# EAGLE board latdr31 (EAGLE 7.7.0)
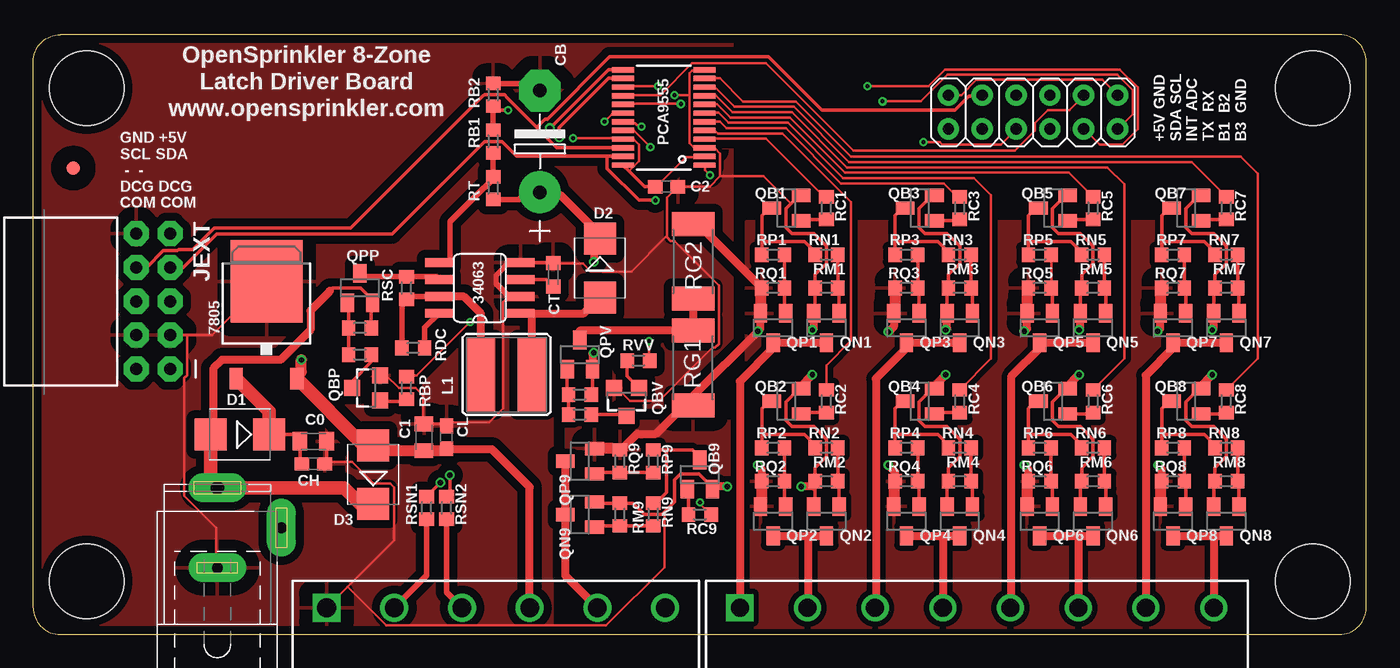
[diagram p0: board, top side]
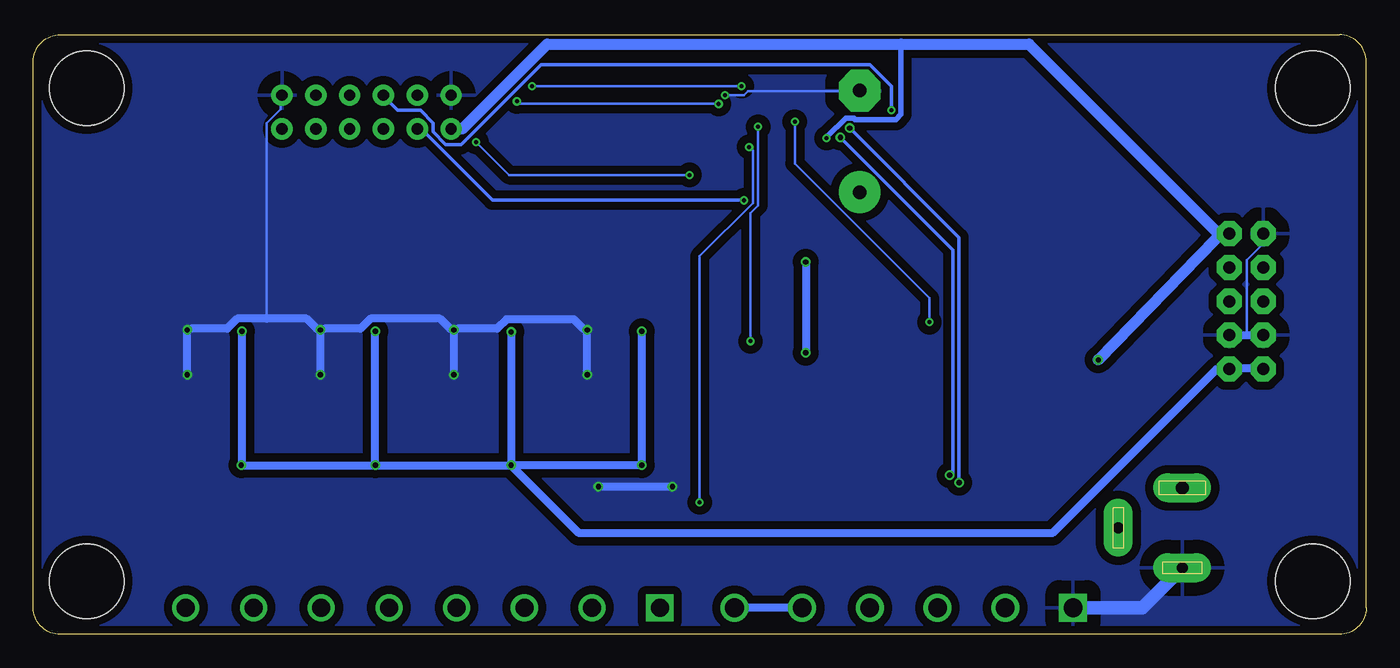
[diagram p1: board, bottom side, seen from below]

Size 100 x 45 mm. Coordinates in mm from the lower left corner, seen from the top.
Outline: 2,0 98,0 arc90 100,2 100,43 arc90 98,45 2,45 arc90 0,43 0,2 arc90 2,0
Copper layers (1*16): Top 0.035mm / dielectric 1.5mm / Bottom 0.035mm
Design rules "Fusion_eagle_rule_v1.1 *": minimum track width 6mil, minimum drill 12mil, track to track 6mil, track to pad 6mil, pad to pad 6mil, via to via 6mil, smd to smd 0mil, copper to edge 10mil, drill to drill 10mil, minimum pad ring 10mil, minimum via ring 6mil, stop-mask expansion 2mil, vias tented up to drill 100mil, thermal gap 40mil
Net classes: 0 default: width 0.203 mm, clearance 0.178 mm; 1 power: width 0.203 mm, clearance 0.178 mm; 2 relaypower: width 0.508 mm, clearance 0.305 mm; 3 signal: width 0.254 mm, clearance 0.178 mm; 4 adc: width 0.406 mm, clearance 0.178 mm
Holes 5.6 mm at 4,4 96,4 4,41 96,41

## Footprints (pad centres in the part's own frame; a part is rotated, then mirrored left to right if it is on the bottom)
FIDUCIAL_1MM = smd 1 x 1: 1 0,0
TO252 = smd 1 x 1.6: 1 -2.28,-4.8; 2 2.28,-4.8 | smd 5.4 x 6.2: 3 0,2.5
SO08 = smd 0.66 x 2.032: 1 -1.905,-3.073; 2 -0.635,-3.073; 3 0.635,-3.073; 4 1.905,-3.073; 5 1.905,3.073; 6 0.635,3.073; 7 -0.635,3.073; 8 -1.905,3.073
C0805K = smd 1.1 x 1.4: 1 -1,0; 2 1,0
C0603 = smd 1.1 x 1: 1 -0.85,0; 2 0.85,0
E7,5-16 = drill 1.016 pad 3.15: + -3.81,0 | drill 1.016 pad 3.15 octagon: - 3.81,0
C0603K = smd 1.05 x 1.08: 1 -0.875,0; 2 0.875,0
SMB = smd 2.4 x 2.4: A 2.2,0; C -2.2,0
SPC4077 = drill 0.8 pad 2.184 long: 1 -3,0; 2 0,-4.8 | drill 1 pad 2.184 long: 3 3,0
SCREWTERMINAL-5MM-6 = drill 1.4 pad 2.032 square: 1 0,0 | drill 1.4 pad 2.032: 2 5.08,0; 3 10.16,0; 4 15.24,0; 5 20.32,0; 6 25.4,0
2X06 = drill 0.85 pad 1.6: 1 -6.35,-1.27; 2 -6.35,1.27; 3 -3.81,-1.27; 4 -3.81,1.27; 5 -1.27,-1.27; 6 -1.27,1.27; 7 1.27,-1.27; 8 1.27,1.27; 9 3.81,-1.27; 10 3.81,1.27; 11 6.35,-1.27; 12 6.35,1.27
2X5-RAF = drill 0.9 pad 1.88 octagon: 1 -1.27,5.08; 2 1.27,5.08; 3 -1.27,2.54; 4 1.27,2.54; 5 -1.27,0; 6 1.27,0; 7 -1.27,-2.54; 8 1.27,-2.54; 9 -1.27,-5.08; 10 1.27,-5.08
CR54 = smd 5.5 x 2.15: P$1 0,1.92; P$2 0,-1.92
TSSOP24 = smd 0.4 x 1.65: 1 -3.575,-3.05; 2 -2.925,-3.05; 3 -2.275,-3.05; 4 -1.625,-3.05; 5 -0.975,-3.05; 6 -0.325,-3.05; 7 0.325,-3.05; 8 0.975,-3.05; 9 1.625,-3.05; 10 2.275,-3.05; 11 2.925,-3.05; 12 3.575,-3.05; 13 3.575,3.05; 14 2.925,3.05; 15 2.275,3.05; 16 1.625,3.05; 17 0.975,3.05; 18 0.325,3.05; 19 -0.325,3.05; 20 -0.975,3.05; 21 -1.625,3.05; 22 -2.275,3.05; 23 -2.925,3.05; 24 -3.575,3.05
SOT23 = smd 1 x 1.4: 1 -0.95,-1.1; 2 0.95,-1.1; 3 0,1.1
SOT23-3 = smd 1.2 x 1.2: 1 -0.95,-1; 2 0.95,-1; 3 0,1.1
R0603 = smd 1 x 1.1: 1 -0.85,0; 2 0.85,0
R2512 = smd 1.8 x 3.2: 1 -2.8,0; 2 2.8,0
SCREWTERMINAL-5MM-8 = drill 1.35 pad 2.032 square: 1 0,0 | drill 1.35 pad 2.032: 2 5.08,0; 3 10.16,0; 4 15.24,0; 5 20.32,0; 6 25.4,0; 7 30.48,0; 8 35.56,0

## Placement (x,y rotation side)
0F  FIDUCIAL  [FIDUCIAL_1MM]  38,33.19 0 top
1F  FIDUCIAL  [FIDUCIAL_1MM]  3,35 0 top
7805  [TO252]  17.5,24 0 top
34063  [SO08]  33.5,26 90 top
C0  10uF  [C0805K]  21,14.5 0 top
C1  10uF  [C0805K]  29.3,14.8 90 top
C2  0.1u  [C0603]  47.5,33.6 0 top
CB  2200uF  [E7,5-16]  38,37 90 top
CH  0.1u  [C0603]  21,12.8 0 top
CL  0.1u  [C0603]  31,14.8 90 top
CT  470  [C0603K]  39,27 90 top
D1  SS34  [SMB]  15.5,15 180 top
D2  SS34  [SMB]  42.5,27.5 270 top
D3  SS34  [SMB]  25.5,12 90 top
J1  [SPC4077]  13.8,8 90 top
JCOM  [SCREWTERMINAL-5MM-6]  22,2 0 top
JCON  [2X06]  75,39.2 0 top
JEXT  M05X2RAF  [2X5-RAF]  9,25 180 top
L1  220uH  [CR54]  35.5,19.5 90 top
PCA9555  PCF8575TSSOP24  [TSSOP24]  47.3,38.8 90 top
QB1  [SOT23]  56.5,32 90 top
QB2  [SOT23]  56.5,17.5 90 top
QB3  [SOT23]  66.5,32 90 top
QB4  [SOT23]  66.5,17.5 90 top
QB5  [SOT23]  76.5,32 90 top
QB6  [SOT23]  76.5,17.5 90 top
QB7  [SOT23]  86.5,32 90 top
QB8  [SOT23]  86.5,17.5 90 top
QB9  [SOT23]  50,12 0 top
QBP  3904  [SOT23-3]  25,18.5 90 top
QBV  3904  [SOT23-3]  44.5,17.5 180 top
QN1  3400  [SOT23]  59.5,23 180 top
QN2  3400  [SOT23]  59.5,8.5 180 top
QN3  3400  [SOT23]  69.5,23 180 top
QN4  3400  [SOT23]  69.5,8.5 180 top
QN5  3400  [SOT23]  79.5,23 180 top
QN6  3400  [SOT23]  79.5,8.5 180 top
QN7  3400  [SOT23]  89.5,23 180 top
QN8  3400  [SOT23]  89.5,8.5 180 top
QN9  3400  [SOT23]  41,9 90 top
QP1  3407  [SOT23]  55.5,23 180 top
QP2  3407  [SOT23]  55.5,8.5 180 top
QP3  3407  [SOT23]  65.5,23 180 top
QP4  3407  [SOT23]  65.5,8.5 180 top
QP5  3407  [SOT23]  75.5,23 180 top
QP6  3407  [SOT23]  75.5,8.5 180 top
QP7  3407  [SOT23]  85.5,23 180 top
QP8  3407  [SOT23]  85.5,8.5 180 top
QP9  3407  [SOT23]  41,13 90 top
QPP  3407  [SOT23]  24.5,26 0 top
QPV  BSS84  [SOT23]  41,21 0 top
RB1  3.3K  [R0603]  34.5,37 90 top
RB2  1.5K  [R0603]  34.5,40.5 90 top
RBP  1K  [R0603]  28,18.5 90 top
RC1  1K  [R0603]  59.5,32 90 top
RC2  1K  [R0603]  59.5,17.5 90 top
RC3  1K  [R0603]  69.5,32 90 top
RC4  1K  [R0603]  69.5,17.5 90 top
RC5  1K  [R0603]  79.5,32 90 top
RC6  1K  [R0603]  79.5,17.5 90 top
RC7  1K  [R0603]  89.5,32 90 top
RC8  1K  [R0603]  89.5,17.5 90 top
RC9  1K  [R0603]  50,9 0 top
RDC  180  [R0603]  28.5,21.5 0 top
RG1  [R2512]  49.5,20 90 top
RG2  [R2512]  49.5,28 270 top
RM1  470K  [R0603]  59.5,28.5 180 top
RM2  470K  [R0603]  59.5,14 180 top
RM3  470K  [R0603]  69.5,28.5 180 top
RM4  470K  [R0603]  69.5,14 180 top
RM5  470K  [R0603]  79.5,28.5 180 top
RM6  470K  [R0603]  79.5,14 180 top
RM7  470K  [R0603]  89.5,28.5 180 top
RM8  470K  [R0603]  89.5,14 180 top
RM9  470K  [R0603]  46.5,9 90 top
RN1  470K  [R0603]  59.5,26 180 top
RN2  470K  [R0603]  59.5,11.5 180 top
RN3  470K  [R0603]  69.5,26 180 top
RN4  470K  [R0603]  69.5,11.5 180 top
RN5  470K  [R0603]  79.5,26 180 top
RN6  470K  [R0603]  79.5,11.5 180 top
RN7  470K  [R0603]  89.5,26 180 top
RN8  470K  [R0603]  89.5,11.5 180 top
RN9  470K  [R0603]  44,9 90 top
RP1  10K  [R0603]  55.5,28.5 0 top
RP2  10K  [R0603]  55.5,14 0 top
RP3  10K  [R0603]  65.5,28.5 0 top
RP4  10K  [R0603]  65.5,14 0 top
RP5  10K  [R0603]  75.5,28.5 0 top
RP6  10K  [R0603]  75.5,14 0 top
RP7  10K  [R0603]  85.5,28.5 0 top
RP8  10K  [R0603]  85.5,14 0 top
RP9  10K  [R0603]  46.5,13 270 top
RPP  100K  [R0603]  24.5,23 180 top
RPV  100K  [R0603]  41,18 180 top
RQ1  10K  [R0603]  55.5,26 0 top
RQ2  10K  [R0603]  55.5,11.5 0 top
RQ3  10K  [R0603]  65.5,26 0 top
RQ4  10K  [R0603]  65.5,11.5 0 top
RQ5  10K  [R0603]  75.5,26 0 top
RQ6  10K  [R0603]  75.5,11.5 0 top
RQ7  10K  [R0603]  85.5,26 0 top
RQ8  10K  [R0603]  85.5,11.5 0 top
RQ9  10K  [R0603]  44,13 270 top
RSC  1  [R0603]  28,26 90 top
RSN1  4K7  [R0603]  29.5,9.5 270 top
RSN2  4K7  [R0603]  31,9.5 270 top
RSP  100K  [R0603]  24.5,21 0 top
RSV  100K  [R0603]  41,16.5 0 top
RT  75K  [R0603]  34.5,33.5 90 top
RVV  1K  [R0603]  45.4,20.55 0 top
S02  [SCREWTERMINAL-5MM-8]  53,2 0 top

## Library data of the parts
0F 1F RB1 RB2 RBP RC1-RC9 RDC RM1-RM9 RN1-RN9 RP1-RP9 RPP RPV RQ1-RQ9 RSC RSP RSV RT RVV = adafruitGood
7805 = linear
34063 C0 C1 C2 CH CL CT = adafruit
CB = rcl
D1-D3 = diode
J1 = con-jack; OC_FARNELL: unknown; OC_NEWARK: unknown
JCOM RG1 RG2 S02 = SparkFun
JCON = pinhead
JEXT L1 PCA9555 QBP QBV = SparkFunNew
QB1-QB9 QN1-QN9 QP1-QP9 QPP QPV = transistor-small-signal
RSN1 RSN2 = adafruit2013

## Nets
ADC [signal]: JCON.6 RB1.2 RB2.1
B1: JCON.9 PCA9555.15
B2: JCON.10 PCA9555.16
B3: JCON.11 PCA9555.17
BOOST_V: CB.+ D2.C QPV.2 RPV.1 RT.1
BPE: PCA9555.18 RBP.2
BSTV [power]: JEXT.1 JEXT.2 QP1.2 QP2.2 QP3.2 QP4.2 QP5.2 QP6.2 QP7.2 QP8.2 QP9.2 RG1.1 RG2.1 RQ1.1 RQ2.1 RQ3.1 RQ4.1 RQ5.1 RQ6.1 RQ7.1 RQ8.1 RQ9.1
BSTV_PRE [power]: QPV.3 RG1.2 RG2.2
BVC: PCA9555.20 RC9.2
BVE: PCA9555.19 RVV.2
COM [power]: JCOM.5 JCOM.6 QN9.3 QP9.3
DCIN_PRE: D1.A D3.C J1.3 QPP.2 RPP.1
DSCL [signal]: JCON.4 JEXT.8 PCA9555.22
DSDA [signal]: JCON.3 JEXT.7 PCA9555.23
DVIN [power]: 7805.2 C1.1 C2.1 CL.1 D3.A JCOM.4 JCON.1 JEXT.9 PCA9555.2 PCA9555.21 PCA9555.24
GND: 7805.3 34063.2 34063.4 C0.2 C1.2 C2.2 CB.- CH.2 CL.2 CT.2 J1.1 JCOM.1 JCON.2 JCON.12 JEXT.3 JEXT.4 JEXT.10 PCA9555.3 PCA9555.12 QB1.2 QB2.2 QB3.2 QB4.2 QB5.2 QB6.2 QB7.2 QB8.2 QB9.2 QBP.2 QBV.2 QN1.2 QN2.2 QN3.2 QN4.2 QN5.2 QN6.2 QN7.2 QN8.2 QN9.2 RB2.2 RN1.2 RN2.2 RN3.2 RN4.2 RN5.2 RN6.2 RN7.2 RN8.2 RN9.2
INT: JCON.5 PCA9555.1
N$1: 34063.1 D2.A L1.P$2
N$2: JCOM.2 RSN1.2
N$3: JCOM.3 RSN2.2
N$6: QB2.1 RC2.1
N$7: QB9.1 RC9.1
N$11: QB1.1 RC1.1
N$12: QB4.1 RC4.1
N$13: QB3.1 RC3.1
N$17: 34063.3 CT.1
N$19: QB5.1 RC5.1
N$23: QB6.1 RC6.1
N$24: 34063.8 RDC.2
N$26: 34063.7 L1.P$1 RDC.1 RSC.1
N$27: 34063.6 QPP.3 RSC.2
N$28: QBP.1 RBP.1
N$29: 34063.5 RB1.1 RT.2
N$30: QPP.1 RPP.2 RSP.1
N$33: QB7.1 RC7.1
N$34: QBV.3 RSV.2
N$35: QBP.3 RSP.2
N$38: QPV.1 RPV.2 RSV.1
N$40: QB8.1 RC8.1
N$50: QBV.1 RVV.1
N$100: QB9.3 RM9.2 RP9.1
N$101: QB1.3 RM1.2 RP1.1
N$102: QB2.3 RM2.2 RP2.1
N$103: QB3.3 RM3.2 RP3.1
N$104: QB4.3 RM4.2 RP4.1
N$105: QB5.3 RM5.2 RP5.1
N$106: QB6.3 RM6.2 RP6.1
N$107: QB7.3 RM7.2 RP7.1
N$108: QB8.3 RM8.2 RP8.1
N$200: QP9.1 RP9.2 RQ9.2
N$201: QP1.1 RP1.2 RQ1.2
N$202: QP2.1 RP2.2 RQ2.2
N$203: QP3.1 RP3.2 RQ3.2
N$204: QP4.1 RP4.2 RQ4.2
N$205: QP5.1 RP5.2 RQ5.2
N$206: QP6.1 RP6.2 RQ6.2
N$207: QP7.1 RP7.2 RQ7.2
N$208: QP8.1 RP8.2 RQ8.2
N$300: QN9.1 RM9.1 RN9.1
N$301: QN1.1 RM1.1 RN1.1
N$302: QN2.1 RM2.1 RN2.1
N$303: QN3.1 RM3.1 RN3.1
N$304: QN4.1 RM4.1 RN4.1
N$305: QN5.1 RM5.1 RN5.1
N$306: QN6.1 RM6.1 RN6.1
N$307: QN7.1 RM7.1 RN7.1
N$308: QN8.1 RM8.1 RN8.1
P0: PCA9555.4 RC1.2
P1: PCA9555.5 RC2.2
P2: PCA9555.6 RC3.2
P3: PCA9555.7 RC4.2
P4: PCA9555.8 RC5.2
P5: PCA9555.9 RC6.2
P6: PCA9555.10 RC7.2
P7: PCA9555.11 RC8.2
RECDC: 7805.1 C0.1 CH.1 D1.C
RFRX: JCON.8
RFTX: JCON.7
S1: PCA9555.13 RSN1.1
S2: PCA9555.14 RSN2.1
T01 [power]: QN1.3 QP1.3 S02.1
T02 [power]: QN2.3 QP2.3 S02.2
T03 [power]: QN3.3 QP3.3 S02.3
T04 [power]: QN4.3 QP4.3 S02.4
T05 [power]: QN5.3 QP5.3 S02.5
T06 [power]: QN6.3 QP6.3 S02.6
T07 [power]: QN7.3 QP7.3 S02.7
T08 [power]: QN8.3 QP8.3 S02.8

## Tracks (layer width: path | path; a pad name or v marks a point on that pad's centre or on a via)
ADC  (via drill 0.3)
  Top 0.254: v35.62,39.34 34.67,39.34 RB2.1
  Top 0.406: RB2.1 RB1.2
  Bottom 0.254: v35.62,39.34 35.62,41.15 37.24,42.77 61.91,42.77 67.91,36.77 69.06,36.77 70.01,37.72 70.01,38.39 70.96,39.34 72.68,39.34 73.72,40.39 JCON.6
B1  (via drill 0.3)
  Top 0.203: v46.86,41.15 44.29,41.15 PCA9555.15 | v62.58,41.15 67.15,41.15 68.39,42.39 81.53,42.39 82.87,41.05 82.87,37.91 81.72,36.77 80.01,36.77 78.87,37.91 JCON.9
  Bottom 0.203: v62.58,41.15 v46.86,41.15
B2
  Top 0.203: PCA9555.16 44.29,40.48 47.05,40.48 49.44,42.86 54.96,42.86 61.53,36.29 73.63,36.29 75.15,37.81 75.15,38.39 76.11,39.34 77.72,39.34 78.77,40.39 JCON.10
B3  (via drill 0.3)
  Top 0.203: v48.58,39.81 44.29,39.81 PCA9555.17 | v63.72,40.01 66.58,40.01 68.58,42.01 81.34,42.01 82.49,40.86 82.49,39.05 81.44,38.01 JCON.11
  Bottom 0.203: v48.58,39.81 63.53,39.81 v63.72,40.01
BOOST_V  (via drill 0.4)
  Top 0.254: QPV.2 41.95,18.1 RPV.1
  Top 0.406: RT.1 36.45,32.65 37,33.2 CB.+
  Top 0.61: CB.+ 38,33 39.5,33 42.5,30 D2.C 42.4,29.4 42.05,29.05 v42.05,27.95 | QPV.2 41.95,21.05 v42.05,21.15
  Bottom 0.61: v42.05,27.95 v42.05,21.15
BPE  (via drill 0.3)
  Top 0.203: v32.77,23.43 28.77,19.43 28,19.43 RBP.2 | v42.86,38.48 43.43,39.05 44.2,39.05 PCA9555.18
  Bottom 0.203: v32.77,23.43 32.77,25.24 42.86,35.34 v42.86,38.48
BSTV  (via drill 0.4)
  Top 0.203: 64.67,25.91 RQ3.1 | 64.67,24.38 QP3.2
  Top 0.254: 54.55,25.5 54.65,25.6 RQ1.1 | 54.65,10.1 54.55,10 QP2.2 | 64.55,11 64.65,11.1 RQ4.1 | 74.55,25.5 74.65,25.6 RQ5.1 | 74.55,11 74.65,11.1 RQ6.1 | 84.55,25.5 84.65,25.6 RQ7.1 | 84.55,11 84.65,11.1 RQ8.1 | 43.5,13.95 43.6,13.85 RQ9.1
  Top 0.61: 44.3,13.85 RQ9.1 44.4,14.15 45.3,15.05 46.7,15.05 48.7,17.05 RG1.1 | QP1.2 54.55,22.95 v54.35,22.75 49.5,17.9 RG1.1 | v54.35,12.7 54.65,12.4 RQ2.1 | RQ4.1 64.65,12.2 v64.15,12.7 | QP5.2 74.55,22.95 v74.35,22.75 | v74.35,12.7 74.65,12.4 RQ6.1 | QP7.2 84.55,22.95 v84.35,22.75 | v84.4,12.7 84.65,12.45 RQ8.1 | QP3.2 64.55,23.1 v64.15,22.7 | 48.75,17.35 RG1.1 | RG2.1 49.85,30.8 RQ1.1
  Top 0.813: 54.55,25.5 QP1.2 | 54.65,10.1 RQ2.1 | 64.55,11 QP4.2 | 74.55,25.5 QP5.2 | 74.55,11 QP6.2 | 84.55,25.5 QP7.2 | 84.55,11 QP8.2 | 43.5,13.95 QP9.2 | 64.67,24.38 64.67,25.91
  Bottom 0.61: v54.35,22.75 v54.35,12.7 v64.15,12.7 | v74.35,12.7 v74.35,22.75 | v84.35,22.75 84.35,12.75 v84.4,12.7 v74.35,12.7 | v74.35,12.7 v64.15,12.7 | v64.15,22.7 v64.15,12.7 | JEXT.2 7.75,19.95 10.25,19.95 JEXT.1 10.55,19.9 11.25,19.9 23.55,7.6 59.05,7.6 v64.15,12.7
  pour Top (isolate 0.406): 40,0 40,16 53.5,16 53.5,31 93,31 93,0
BSTV_PRE
  Top 0.61: RG2.2 RG1.2 41,22.8 QPV.3
BVC  (via drill 0.3)
  Top 0.203: v50.01,9.91 50.01,9.81 50.77,9.05 RC9.2 | v46.29,36.58 45.05,37.81 44.29,37.81 PCA9555.20
  Bottom 0.203: v50.01,9.91 50.01,28.38 46.01,32.38 46.01,36.29 v46.29,36.58
BVE  (via drill 0.3)
  Top 0.203: v46.2,22 46.2,20.57 RVV.2 | v45.62,38.1 45.43,38.1 45.15,38.39 44.29,38.39 PCA9555.19
  Bottom 0.203: v46.2,22 46.2,31.62 45.62,32.19 v45.62,38.1
COM
  Top 0.61: QP9.3 QN9.3 39.9,4.42 JCOM.5
  Bottom 0.61: JCOM.5 JCOM.6
DCIN_PRE
  Top 0.254: 22.25,25.8 22.45,26 24.55,26 25.45,25.1 QPP.2 25.35,24.8 RPP.1
  Top 0.61: D1.A 13.5,15.5 13.5,19.95 14.15,20.6 18.55,20.6 20.8,22.85 20.8,24.3 22.2,25.7 22.25,25.8
  Top 1.016: D1.A 13.3,11.5 J1.3 23.3,11 24.5,9.8 D3.C
DSCL
  Top 0.254: JEXT.8 7.75,27.55 8.5,27.55 9.75,28.8 10.8,28.8 10.9,28.9 11.95,28.9 13.55,30.5 23.8,30.5 33.75,40.45 33.85,40.5 35.35,40.5 35.55,40.3 37.77,38.05 | 37.77,38.05 39.25,36.55 44.25,36.55 PCA9555.22 | JCON.4 71.15,40.39 70.2,40.39 69.15,39.34 59.15,39.34 55.15,43.34 43.24,43.34 38.58,38.67 38.39,38.67 37.81,38.1 37.77,38.05
DSDA  (via drill 0.3)
  Top 0.254: 43.05,35.9 36.25,35.9 35.15,37 33.85,37 26.9,30.05 13.75,30.05 11.25,27.55 10.3,27.55 JEXT.7 | 43.05,35.9 44.25,35.9 PCA9555.23 | v46.67,32.58 45.43,32.58 43.05,34.96 43.05,35.9
  Bottom 0.254: v46.67,32.58 65.53,32.58 70.87,37.91 71.15,37.91 JCON.3
DVIN  (via drill 0.3, 0.4)
  Top 0.203: 44.68,34.77 45.43,35.53 45.43,36.77 45.05,37.15 44.29,37.15 PCA9555.21 44.2,37.24 v40.48,37.24 | PCA9555.2 50.29,35.81 48.96,35.81 46.77,33.62 C2.1
  Top 0.254: C2.1 45.85,33.6 44.68,34.77 44.25,35.2 PCA9555.24
  Top 0.61: JCOM.4 37.24,11.06 34.4,13.9 31.05,13.9 CL.1
  Top 0.813: D3.A 25.8,13.8 C1.1 30.75,13.8 CL.1 | v20.1,20.6 20.1,19.7 19.95,19.7 7805.2
  Top 1.016: D3.A 24.78,14.2 7805.2
  Bottom 0.406: 34.9,44.3 34.9,39.05 35.3,38.65 38.35,38.65 38.45,38.75 39.05,38.75 40.45,37.35 40.45,37.25 v40.48,37.24
  Bottom 0.813: JCON.1 68.65,37.95 67.8,37.95 61.45,44.3 34.9,44.3 25.3,44.3 11.1,30.1 | 11.1,30.1 10.3,30.1 JEXT.9 | v20.1,20.6 11.25,29.7 11.1,30.1
GND  (via drill 0.3, 0.4)
  Top 0.203: 23.57,3.57 JCOM.1 | 23.57,3.57 27.05,7.05 27.05,11.05 26.77,11.34 25.53,11.34 23.91,12.95 22.1,12.95 CH.2 | 11.53,22.48 13.43,22.48 17.43,26.48 7805.3 | 11.53,22.48 10.29,22.48 JEXT.3 | 11.53,22.48 11.53,19.43 11.34,19.24 11.34,10.38 13.72,8 13.72,5.05 J1.1 | JCON.2 68.67,40.48 69.63,40.48 70.77,41.62 80.2,41.62 81.34,40.48 JCON.12 | QBP.2 26,19.43 26.48,19.43 27.43,18.48 28.67,18.48 29.24,17.91 29.24,15.91 C1.2 | CL.2 31.05,15.91 34.2,15.91 35.24,16.95 35.24,24.96 35.53,25.24 35.65,25.4 | 51.53,34.38 50.77,33.62 48.39,33.62 C2.2 48.29,33.53 47.53,32.77 47.53,29.81 | 51.53,34.38 51.53,36.1 51.15,36.48 50.39,36.48 PCA9555.3 50.29,36.58 49.53,36.58 49.24,36.86 49.24,40.48 | 47.53,29.81 47.82,29.53 48.1,29.53 51.44,26.19 51.44,21.81 51.15,21.53 50.96,21.53 46.96,17.53 44.77,17.53 43.81,18.48 43.62,18.48 QBV.2 | 49.24,40.48 49.24,42.1 49.44,42.29 50.29,42.29 PCA9555.12 | 49.24,40.48 v48.1,40.48 | CT.2 39.05,27.81 41.24,27.81 41.81,27.24 44.86,27.24 47.43,29.81 47.53,29.81 | 56.83,32.33 54.77,34.38 51.53,34.38 | 23.57,3.57 26.48,0.67 42.96,0.67 47.34,5.05 47.34,9.05 47.27,9.12
  Top 0.254: QN1.2 58.55,24.5 58.65,24.6 RN1.2 58.65,27 59.5,27.85 59.5,29.15 58.55,30.1 56.9,30.1 56.45,30.55 56.45,31.95 56.83,32.33 57.45,32.95 QB1.2 | QN2.2 58.55,10 58.65,10.1 RN2.2 58.65,12.5 59.5,13.35 59.5,14.65 58.55,15.6 56.9,15.6 56.45,16.05 56.45,17.45 57.45,18.45 QB2.2 | QN3.2 68.55,25.5 68.65,25.6 RN3.2 68.65,27 69.5,27.85 69.5,29.15 68.55,30.1 66.9,30.1 66.45,30.55 66.45,31.95 67.45,32.95 QB3.2 | QN4.2 68.55,11 68.65,11.1 RN4.2 68.65,12.5 69.5,13.35 69.5,14.65 68.55,15.6 66.9,15.6 66.45,16.05 66.45,17.45 67.45,18.45 QB4.2 | QN5.2 78.55,25.5 78.65,25.6 RN5.2 78.65,27 79.5,27.85 79.5,29.15 78.55,30.1 76.9,30.1 76.45,30.55 76.45,31.95 77.45,32.95 QB5.2 | QN6.2 78.55,11 78.65,11.1 RN6.2 78.65,12.5 79.5,13.35 79.5,14.65 78.55,15.6 76.9,15.6 76.45,16.05 76.45,17.45 77.45,18.45 QB6.2 | QN7.2 88.55,25.5 88.65,25.6 RN7.2 88.65,27 89.5,27.85 89.5,29.15 88.55,30.1 86.9,30.1 86.45,30.55 86.45,31.95 87.45,32.95 QB7.2 | QN8.2 88.55,11 88.65,11.1 RN8.2 88.65,12.5 89.5,13.35 89.5,14.65 88.55,15.6 86.9,15.6 86.45,16.05 86.45,17.45 87.45,18.45 QB8.2 | QN9.2 42.5,9.95 42.6,9.85 RN9.2 45,9.85 45.85,9 47.15,9 47.27,9.12 48.1,9.95 48.1,11.6 48.55,12.05 49.95,12.05 50.95,11.05 QB9.2 | C0.2 22,12.95 CH.2 | CL.2 31,15.8 C1.2 | 34063.4 38.97,27.91 CT.2
  Top 0.406: RB2.2 37.46,41.35 CB.- | 34063.4 35.66,27.91 34.7,26.95 34.7,26.35 35.65,25.4 36.54,25.4 34063.2
  Top 0.61: QN1.2 58.55,22.95 v58.45,22.85 | v58.45,19.5 57.5,18.55 QB2.2 | QN3.2 68.55,22.95 v68.45,22.85 | v68.45,19.5 67.5,18.55 QB4.2 | QN5.2 78.55,22.95 v78.45,22.85 | v78.45,19.5 77.5,18.55 QB6.2 | QN7.2 88.55,22.95 v88.45,22.85 | v88.45,19.5 87.5,18.55 QB8.2 | v52.05,11.1 51.05,11.1 QB9.2 | v57.6,11.1 58.55,11.1 RN2.2
  Bottom 0.203: 8.95,22.45 8.95,28.1 7.81,29.24 7.81,30 JEXT.10 | 82.49,23.7 82.49,38.39 81.44,39.43 81.44,40.39 JCON.12 | v48.1,40.48 46.67,40.48 46.39,40.77 38.01,40.77 CB.-
  Bottom 0.61: JEXT.3 10.25,22.45 8.95,22.45 7.75,22.45 JEXT.4 | v58.45,19.5 v58.45,22.85 58.75,22.95 59.45,23.65 64.5,23.65 65.2,22.95 68.15,22.95 v68.45,22.85 | v68.45,19.5 v68.45,22.85 | v78.45,19.5 v78.45,22.85 | v88.45,19.5 v88.45,22.85 88.15,22.95 85.45,22.95 84.7,23.7 82.49,23.7 79.5,23.7 78.75,22.95 v78.45,22.85 | v78.45,22.85 78.15,22.95 75.45,22.95 74.7,23.7 69.5,23.7 68.75,22.95 v68.45,22.85 | v57.6,11.1 v52.05,11.1
  Bottom 1.016: JCOM.1 16.8,2 J1.1
  pour Top (isolate 0.61): 0,45 52.5,45 52.5,17 39,17 39,0 0,0
  pour Bottom (isolate 0.61): 0,45 100,45 100,0 0,0
INT  (via drill 0.3)
  Top 0.203: v50.77,34.48 50.39,34.86 50.39,35.15 PCA9555.1 | v66.77,36.96 68.01,36.96 68.2,36.77 72.58,36.77 73.72,37.91 JCON.5
  Bottom 0.203: v50.77,34.48 64.29,34.48 v66.77,36.96
N$1
  Top 0.61: 34063.1 37.25,24.09 | 37.25,24.09 41.3,24.09 D2.A | L1.P$2 37.42,23.93 37.25,24.09
N$2
  Top 0.406: RSN1.2 29.5,4.42 JCOM.2
N$3
  Top 0.406: RSN2.2 31,3.16 JCOM.3
N$6
  Top 0.254: RC2.1 58.1,16.65 58,16.55 QB2.1
N$7
  Top 0.254: RC9.1 49.15,10.4 49.05,10.5 QB9.1
N$11
  Top 0.254: RC1.1 58.1,31.15 58,31.05 QB1.1
N$12
  Top 0.254: RC4.1 68.1,16.65 68,16.55 QB4.1
N$13
  Top 0.254: QB3.1 69,31.05 69.1,31.15 RC3.1
N$17
  Top 0.254: 34063.3 38.49,26.64 CT.1
N$19
  Top 0.254: RC5.1 78.1,31.15 78,31.05 QB5.1
N$23
  Top 0.254: QB6.1 79,16.55 79.1,16.65 RC6.1
N$24
  Top 0.406: RDC.2 29.35,23.02 34063.8
N$26
  Top 0.406: 34063.7 28.21,25.36 RSC.1 27.65,24.8 RDC.1
  Top 0.61: L1.P$1 33.58,24.07 32.3,25.35 30.44,25.35 34063.7
N$27
  Top 0.406: QPP.3 24.5,26.85 RSC.2 30.21,26.85 34063.6
N$28
  Top 0.254: RBP.1 28,17.5 26,17.5 QBP.1
N$29
  Top 0.406: RB1.1 RT.2 34.45,34.15 33.85,33.55 33.8,33.55 31.25,31 31.25,27.9 30.45,27.9 34063.5
N$30
  Top 0.254: QPP.1 23.55,24.5 23.65,24.4 RPP.2 RSP.1
N$33
  Top 0.254: RC7.1 88.1,31.15 88,31.05 QB7.1
N$34
  Top 0.254: RSV.2 44.4,16.5 QBV.3
N$35
  Top 0.254: QBP.3 23.9,19 25.35,20.45 RSP.2
N$38
  Top 0.254: QPV.1 40.05,18.1 RPV.2 RSV.1
N$40
  Top 0.254: QB8.1 89,16.55 89.1,16.65 RC8.1
N$50
  Top 0.254: RVV.1 44.55,19.4 QBV.1
N$100
  Top 0.254: 47.5,13.85 49.45,13.85 50,13.3 QB9.3 | 47.5,13.85 RP9.1 | 47.5,13.85 47.5,10.65 46.7,9.85 RM9.2
N$101
  Top 0.254: 54.65,29.5 54.65,31.45 55.2,32 QB1.3 | 54.65,29.5 RP1.1 | 54.65,29.5 57.85,29.5 58.65,28.7 RM1.2
N$102
  Top 0.254: 54.65,15 54.65,16.95 55.2,17.5 QB2.3 | 54.65,15 RP2.1 | 54.65,15 57.85,15 58.65,14.2 RM2.2
N$103
  Top 0.254: 64.65,29.5 64.65,31.45 65.2,32 QB3.3 | 64.65,29.5 RP3.1 | 64.65,29.5 67.85,29.5 68.65,28.7 RM3.2
N$104
  Top 0.254: 64.65,15 64.65,16.95 65.2,17.5 QB4.3 | 64.65,15 RP4.1 | 64.65,15 67.85,15 68.65,14.2 RM4.2
N$105
  Top 0.254: 74.65,29.5 74.65,31.45 75.2,32 QB5.3 | 74.65,29.5 RP5.1 | 74.65,29.5 77.85,29.5 78.65,28.7 RM5.2
N$106
  Top 0.254: 74.65,15 74.65,16.95 75.2,17.5 QB6.3 | 74.65,15 RP6.1 | 74.65,15 77.85,15 78.65,14.2 RM6.2
N$107
  Top 0.254: 84.65,29.5 84.65,31.45 85.2,32 QB7.3 | 84.65,29.5 RP7.1 | 84.65,29.5 87.85,29.5 88.65,28.7 RM7.2
N$108
  Top 0.254: 84.65,15 84.65,16.95 85.2,17.5 QB8.3 | 84.65,15 RP8.1 | 84.65,15 87.85,15 88.65,14.2 RM8.2
N$200
  Top 0.254: QP9.1 42.5,12.05 42.6,12.15 RQ9.2 RP9.2
N$201
  Top 0.254: RP1.2 RQ1.2 56.35,24.6 56.45,24.5 QP1.1
N$202
  Top 0.254: RP2.2 RQ2.2 56.35,10.1 56.45,10 QP2.1
N$203
  Top 0.254: QP3.1 66.45,25.5 66.35,25.6 RQ3.2 RP3.2
N$204
  Top 0.254: QP4.1 66.45,11 66.35,11.1 RQ4.2 RP4.2
N$205
  Top 0.203: RP5.2 76.39,28.48 76.39,26.1 RQ5.2
  Top 0.254: QP5.1 76.45,25.5 76.35,25.6 RQ5.2
N$206
  Top 0.254: RP6.2 RQ6.2 76.35,11.1 76.45,11 QP6.1
N$207
  Top 0.254: QP7.1 86.45,25.5 86.35,25.6 RQ7.2 RP7.2
N$208
  Top 0.254: RP8.2 RQ8.2 86.35,11.1 86.45,11 QP8.1
N$300
  Top 0.254: QN9.1 42.5,8.05 42.6,8.15 RN9.1 RM9.1
N$301
  Top 0.254: RM1.1 RN1.1 60.35,25.6 60.45,25.5 QN1.1
N$302
  Top 0.254: RM2.1 RN2.1 60.35,11.1 60.45,11 QN2.1
N$303
  Top 0.254: RM3.1 RN3.1 70.35,25.6 70.45,25.5 QN3.1
N$304
  Top 0.254: RM4.1 RN4.1 70.35,11.1 70.45,11 QN4.1
N$305
  Top 0.254: QN5.1 80.45,25.5 80.35,25.6 RN5.1 RM5.1
N$306
  Top 0.254: QN6.1 80.45,11 80.35,11.1 RN6.1 RM6.1
N$307
  Top 0.254: QN7.1 90.45,25.5 90.35,25.6 RN7.1 RM7.1
N$308
  Top 0.254: QN8.1 90.45,11 90.35,11.1 RN8.1 RM8.1
P0
  Top 0.203: RC1.2 59.3,32.85 54.95,37.2 50.35,37.2 PCA9555.4
P1
  Top 0.203: RC2.2 59.5,20.2 61.35,22.05 61.35,32.45 56.2,37.6 51.35,37.6 51.1,37.85 50.35,37.85 PCA9555.5
P2
  Top 0.203: PCA9555.6 50.35,38.5 51.5,38.5 52,38 56.45,38 60.6,33.85 68.3,33.85 69.3,32.85 RC3.2
P3
  Top 0.203: RC4.2 71.85,20.7 71.85,32.98 70.58,34.25 60.75,34.25 56.6,38.4 52.15,38.4 51.4,39.15 50.35,39.15 PCA9555.7
P4
  Top 0.203: RC5.2 77.7,34.65 60.9,34.65 56.75,38.8 52.3,38.8 51.3,39.8 50.35,39.8 PCA9555.8
P5
  Top 0.203: RC6.2 81.85,20.7 81.85,33.78 80.58,35.05 61.05,35.05 56.9,39.2 52.45,39.2 51.2,40.45 50.35,40.45 PCA9555.9
P6
  Top 0.203: RC7.2 86.9,35.45 61.2,35.45 57.05,39.6 52.6,39.6 51.1,41.1 50.35,41.1 PCA9555.10
P7
  Top 0.203: RC8.2 91.85,20.7 91.85,34.58 90.58,35.85 61.35,35.85 57.2,40 53.25,40 51.5,41.75 50.35,41.75 PCA9555.11
RECDC
  Top 0.254: D1.C 19.5,15 C0.1 20,12.95 CH.1
  Top 1.016: D1.C 17.7,16.72 7805.1
S1  (via drill 0.4)
  Top 0.254: v38.75,38 43.15,42.4 44.25,42.4 PCA9555.13 | v30.55,11.4 29.55,10.4 29.55,10.35 RSN1.1
  Bottom 0.254: v38.75,38 30.55,29.8 v30.55,11.4
S2  (via drill 0.4)
  Top 0.254: v39.45,37.3 39.45,38.05 43.15,41.75 44.25,41.75 PCA9555.14 | v31.25,11.95 31.25,10.35 RSN2.1
  Bottom 0.254: v39.45,37.3 31,28.85 31,11.95 v31.25,11.95
T01
  Top 0.61: QN1.3 QP1.3 55.5,21.5 53,19 S02.1
T02
  Top 0.61: QP2.3 58.1,7.4 | 58.1,7.4 QN2.3 | 58.1,7.4 58.1,2 S02.2
T03
  Top 0.61: QN3.3 QP3.3 65.5,21.5 63.2,19.2 63.2,2 S02.3
T04
  Top 0.61: QP4.3 68.25,7.4 | 68.25,7.4 QN4.3 | 68.25,7.4 S02.4
T05
  Top 0.61: QN5.3 QP5.3 75.5,21.5 73.35,19.35 73.35,2 S02.5
T06
  Top 0.61: QP6.3 78.4,7.4 | 78.4,7.4 QN6.3 | 78.4,7.4 S02.6
T07
  Top 0.61: QN7.3 QP7.3 85.5,21.5 83.45,19.45 83.45,2 S02.7
T08
  Top 0.61: QP8.3 88.55,7.4 | 88.55,7.4 QN8.3 | 88.55,7.4 S02.8

## Text on the board
tNames: OpenSprinkler 8-Zone | Latch Driver Board | www.opensprinkler.com | +5V GND / SDA SCL / INT ADC / TX RX / B1 B2 / B3 GND | GND +5V / SCL SDA / - - / DCG DCG / COM COM